# EAGLE board supermercado_sim. (EAGLE 9.7.0)

Size 179.76 x 67.43 mm. Coordinates in mm from the lower left corner, seen from the top.
Outline: 0,0 179.76,0 179.76,67.43 0,67.43 0,0
Copper layers (1*16): Top 0.035mm / dielectric 1.5mm / Bottom 0.035mm
Design rules "default": minimum track width 6mil, minimum drill 0.35mm, track to track 6mil, track to pad 6mil, pad to pad 6mil, via to via 6mil, smd to smd 6mil, copper to edge 40mil, drill to drill 6mil, minimum pad ring 10mil, minimum via ring 8mil, stop-mask expansion 4mil, vias tented up to drill 0mil, thermal gap 10mil

## Footprints (pad centres in the part's own frame; a part is rotated, then mirrored left to right if it is on the bottom)
LEDRD254W60D565H860B = drill 0.981 pad 1.581: 1 -1.27,0; 2 1.27,0
7SEG-13 = drill 0.813 long: 1 -5.08,-7.62; 2 -2.54,-7.62; 3 0,-7.62; 4 2.54,-7.62; 5 5.08,-7.62; 6 5.08,7.62; 7 2.54,7.62; 8 0,7.62; 9 -2.54,7.62; 10 -5.08,7.62
HC-SR04 = drill 1.016 long: 1 -3.81,0; 2 -1.27,0; 3 1.27,0; 4 3.81,0
PIEZO = drill 1 pad 1.6: 1 -3.5,0; 2 3.5,0
RESAD1016W63L850D250B = drill 0.83 pad 1.43: 1 -5.08,0; 2 5.08,0
ARDUINO-UNO-R3-SHIELD = drill 1.016 pad 1.88: 3.3V 24.13,-2.54; 5V 24.13,0; A0 24.13,12.7; A1 24.13,15.24; A2 24.13,17.78; A3 24.13,20.32; A4 24.13,22.86; A5 24.13,25.4; AREF -24.13,-13.97; D2 -24.13,20.32; D3 -24.13,17.78; D4 -24.13,15.24; D5 -24.13,12.7; D6 -24.13,10.16; D7 -24.13,7.62; D8 -24.13,3.81; D9 -24.13,1.27; D10 -24.13,-1.27; D11 -24.13,-3.81; D12 -24.13,-6.35; D13 -24.13,-8.89; GND@0 24.13,2.54; GND@1 24.13,5.08; GND@2 -24.13,-11.43; IOREF 24.13,-7.62; NC 24.13,-10.16; RES 24.13,-5.08; RX -24.13,25.4; SCL -24.13,-19.05; SDA -24.13,-16.51; TX -24.13,22.86; VIN 24.13,7.62

## Placement (x,y rotation side)
D1  RED  [LEDRD254W60D565H860B]  121.77,32.54 180 top
DIGIT1  7SEG-CK  [7SEG-13]  153.52,27.46 0 top
DIST1  DISTANCE-SENSOR-4PINHC-SR04  [HC-SR04]  106.53,12.22 180 top
PIEZO1  PIEZO  [PIEZO]  124.31,17.3 180 top
R1  1k  [RESAD1016W63L850D250B]  120.5,45.24 90 top
R2  1k  [RESAD1016W63L850D250B]  145.9,14.76 180 top
R3  1k  [RESAD1016W63L850D250B]  168.89,58.46 90 top
R4  1k  [RESAD1016W63L850D250B]  173.43,54.12 90 top
R5  1k  [RESAD1016W63L850D250B]  143.36,17.3 0 top
R6  1k  [RESAD1016W63L850D250B]  161.14,17.3 0 top
R7  1k  [RESAD1016W63L850D250B]  145.9,35.08 0 top
R8  1k  [RESAD1016W63L850D250B]  143.36,40.16 0 top
R10  1k  [RESAD1016W63L850D250B]  161.14,37.62 0 top
R11  1k  [RESAD1016W63L850D250B]  163.68,35.08 0 top
U1  ARDUINO-UNO-R3-SHIELD  [ARDUINO-UNO-R3-SHIELD]  47.88,29.84 270 top

## Library data of the parts
D1 = Tinkercad; CATEGORY: Opto-Electronic; SUB-CATEGORY: LED; VALUE: LED_RED
DIGIT1 = Tinkercad; CATEGORY: Opto-Electronic; SUB-CATEGORY: Display; TYPE: 7-Segment
DIST1 PIEZO1 R1-R8 R10 R11 U1 = Tinkercad

## Nets
D1_C: D1.2 R1.1
DIGIT1_A: DIGIT1.7 R10.1
DIGIT1_B: DIGIT1.6 R11.1
DIGIT1_C: DIGIT1.4 R6.1
DIGIT1_D: DIGIT1.2 R2.1
DIGIT1_E: DIGIT1.1 R5.2
DIGIT1_F: DIGIT1.9 R7.2
DIGIT1_G: DIGIT1.10 R8.2
U1_5V: DIST1.1 U1.5V
U1_D2: DIST1.3 U1.D2
U1_D3: R5.1 U1.D3
U1_D4: R2.2 U1.D4
U1_D5: R6.2 U1.D5
U1_D6: R8.1 U1.D6
U1_D7: R7.1 U1.D7
U1_D8: R10.2 U1.D8
U1_D9: R11.2 U1.D9
U1_D12: DIST1.2 U1.D12
U1_D13: D1.1 PIEZO1.1 U1.D13
U1_GND: DIGIT1.3 DIST1.4 PIEZO1.2 R1.2 U1.GND@0 U1.GND@1 U1.GND@2

## Tracks (layer width: path | path; a pad name or v marks a point on that pad's centre or on a via)
D1_C  (1 unrouted)
DIGIT1_A  (1 unrouted)
DIGIT1_B  (1 unrouted)
DIGIT1_C  (1 unrouted)
DIGIT1_D  (1 unrouted)
DIGIT1_E  (1 unrouted)
DIGIT1_F  (1 unrouted)
DIGIT1_G  (1 unrouted)
U1_5V  (1 unrouted)
U1_D2  (1 unrouted)
U1_D3  (1 unrouted)
U1_D4  (1 unrouted)
U1_D5  (1 unrouted)
U1_D6  (1 unrouted)
U1_D7  (1 unrouted)
U1_D8  (1 unrouted)
U1_D9  (1 unrouted)
U1_D12  (1 unrouted)
U1_D13  (2 unrouted)
U1_GND  (6 unrouted)